# Altium PCB (3V-16V)-3.3V Regulator.PcbDoc
Units mil, origin at the board's own origin, x right, y up, seen from the top; angles counter-clockwise.
Board outline 6000 x 4000 mil, 2 copper layers (Top Layer, Bottom Layer); 7 components, 7 nets, 19 pads, 0 vias.
Unrouted connection lines stored in the file: 7.
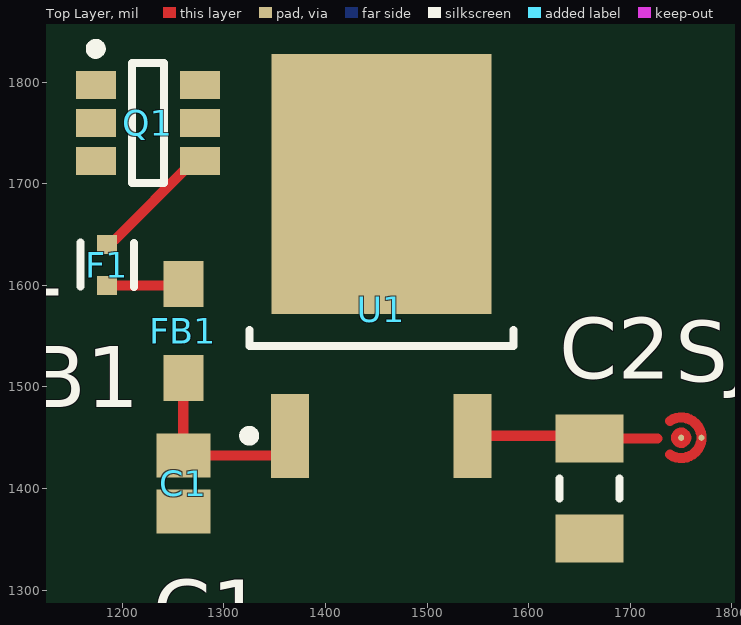
[diagram p0: Top Layer view]
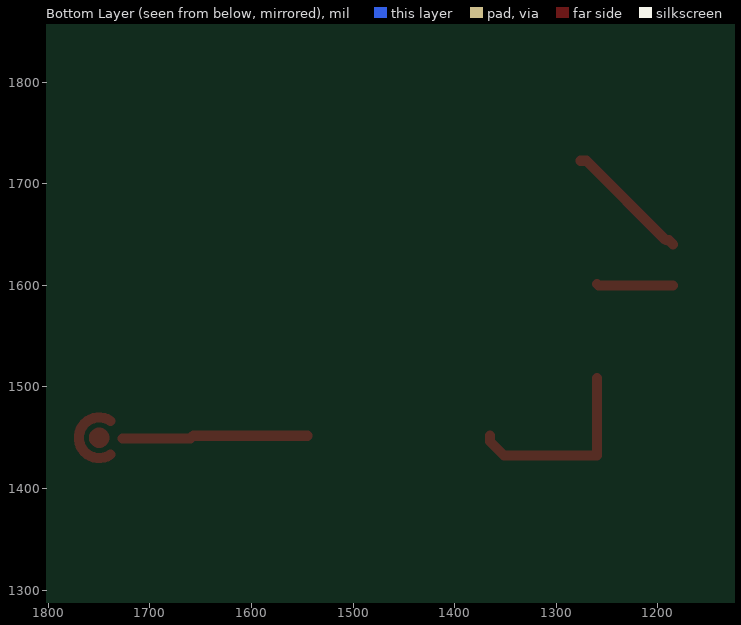
[diagram p1: Bottom Layer view, seen from below]

## Layer stack, top to bottom
Top Solder: solder mask 0.4, Solder Resist, Dk 3.5
Top Layer: signal copper 1.4
Dielectric 1: dielectric 12.6, FR-4, Dk 4.8
Bottom Layer: signal copper 1.4
Bottom Solder: solder mask 0.4, Solder Resist, Dk 3.5

## Board outline
1000,1000 7000,1000 7000,5000 1000,5000

## Design rules (kind name [scope] priority, off if disabled: settings)
Clearance [All] p1: gap=10 ignorepadtopadclearanceinfootprint=FALSE except(0: Arc-Hole Track-Hole SMDPad-Hole THPad-Hole Via-Hole Fill-Hole Poly-Hole Region-Hole Text-Hole)
PolygonConnect [All] p1: connectstyle=Relief reliefconductorwidth=10 reliefentries=4 polygonreliefangle="90 Angle" airgapwidth=10
RoomDefinition "(3V-16V)-3.3V Regulator" [InComponentClass('(3V-16V)-3.3V Regulator')] p1: confinementstyle=ConfineIn formatcopy=TRUE lockcomponents=FALSE outline 988.74,1220 3160,1220 3160,2255 988.74,2255
RoutingVias [All] p1: holewidth=28 width=50 viastyle="Through Hole" minholewidth=28 minwidth=50 maxholewidth=28 maxwidth=50
SolderMaskExpansion [All] p1: expansion=4 istentingtop=FALSE
Width [All] p1: maxlimit=10 minlimit=10 preferedwidth=10
30 further rules are at their usual default settings.

## Components (designator, comment, footprint, x,y, rotation, side; value= is the part's Value field where it differs from the comment)
C1 "100nF" CAPC2013X88X50LL20T25 1260,1405 r90 top
C2 "10uF" CAPC3216X180X50LL20T30 1660,1400 r90 top
F1 "500mA" FP-ERBRD-MFG 1185,1620 r270 top value=310mΩ
FB1 "100 @ 100MHz" SMD-0805 1260,1555 r270 top
Q1 "FDC658AP" FAIR-SOT23-6_V 1225,1760 r0 top
SJ1 "Jumper" "6MIL CIRCULAR" 1750,1450 r180 top
U1 "LF33ABDT-TR" TO-252_N 1455,1619.29 r90 top

## Footprints (in the part's own frame and the unit in brackets; to place one, negate y for a bottom-side part, rotate by r counter-clockwise, add the part's x,y. Pads: shape width x height; smd on the part's side, far side on the other; paste and mask are expansions set on the pad)
"6MIL CIRCULAR" [mil]
  round 6 smd mask+0: 1(0,0) 2(-20,0)
  Top Layer circle w10: c0,0 r5
  Top Layer lines w10: 11.09,16.64 ccw(c0,0) 11.09,-16.64
CAPC2013X88X50LL20T25 [mm] "Chip Capacitor, 2-Leads, Body 2.00x1.25mm, IPC High Density"
  rect 1.1x1.35 smd: 1(-0.7,0) 2(0.7,0)
  body extent -1.1,-0.72 1.1,0.72, height 0.88
CAPC3216X180X50LL20T30 [mm] "Chip Capacitor, 2-Leads, Body 3.4x1.8mm, IPC High Density"
  rect 1.2x1.7 smd: 1(-1.25,0) 2(1.25,0)
  silkscreen extent -0.25,-0.75 0.25,0.75, body extent -1.7,-0.9 1.7,0.9, height 1.8
FAIR-SOT23-6_V [mm] "SOT23, 6-Leads, Body 2.9x1.6mm, Pitch 0.95mm"
  rect 1x0.7 smd: 1(-1.3,0.95) 2(-1.3,0) 3(-1.3,-0.95) 4(1.3,-0.95) 5(1.3,0) 6(1.3,0.95)
  silkscreen extent -1.42,-1.5 0.4,1.97, body extent -1.4,-1.45 1.4,1.45, height 1.45
FP-ERBRD-MFG [mm]
  rect 0.475x0.5 smd paste+0 mask+0: 1(-0.512,0) 2(0.513,0)
  silkscreen extent -0.56,-0.67 0.55,0.67, body extent -0.85,-0.4 0.85,0.4, height 0.25
SMD-0805 [mm] "Chip Inductor, 2-Leads, Body 2.0x1.2mm"
  rect 1.15x1 smd: 1(-1.175,0) 2(1.175,0)
  body extent -1,-0.6 1,0.6, height 0.89
TO-252_N [mm] "D-PAK, 4-Leads, Body 6.1x6.5mm, Pitch 2.28mm, Lead Span 9.7mm, IPC Medium Density"
  rect 2.1x0.95 smd: 1(-4.25,2.28) 3(-4.25,-2.28)
  rect 6.5x5.5 smd: 4(2.05,0)
  silkscreen extent -4.37,-3.3 -1.6,3.43, body extent -2,-3.3 4.2,3.3, height 2.4

## Part data
C1: library part CMP-2007-00278-1, Case Code (Imperial)=0805, Case Code (Metric)=2012, Dielectric=X7R, Dielectric Material=Ceramic, Manufacturer=Kemet, Manufacturer Part Number=C0805C104K5RACAUTO, Max Operating Temperature=125°C, Min Operating Temperature=-55°C, Package Quantity=4000, Ratings=AEC-Q200, Supplier Part Number 1=399-6928-1-ND, Tolerance=10%, Voltage Rating=50V, Capacitance=100nF, Case/Package=0805, Category="Ceramic Capacitors", ComponentLink1Description=https://datasheet.ciiva.com/6093/1732732-6093283.pdf?src-supplier=Farnell, ComponentLink1URL=https://datasheet.ciiva.com/6093/1732732-6093283.pdf?src-supplier=Farnell, ComponentLink2Description=https://datasheet.ciiva.com/7842/1732732-7842183.pdf?src-supplier=Element14, ComponentLink2URL=https://datasheet.ciiva.com/7842/1732732-7842183.pdf?src-supplier=Element14, ComponentLink3Description=https://datasheet.ciiva.com/22703/1732732-22703418.pdf?src-supplier=Element14, ComponentLink3URL=https://datasheet.ciiva.com/22703/1732732-22703418.pdf?src-supplier=Element14, Contact Plating=Tin,Matte, Depth=1.25mm, Height=0.9mm, Length=2mm, Mount="Surface Mount", Packaging="Tape and Reel", Part Number=C0805C104K5RACAUTO, Pricing 1="1=0.20000, 10=0.13900, 100=0.07020, 500=0.04804, 1000=0.04250 (USD)", Radiation Hardening=No, REACH SVHC="No SVHC", RoHS=Yes, Stock 1=74500, Supplier 1=Digi-Key, Termination=SMD/SMT, Thickness=0.035inch, Voltage Rating (DC)=50V, Width=0.049inch
C2: library part CMP-2000-06107-1, "Chip Capacitor, 10 uF, +/- 10%, 25 V, -55 to 85 degC, 1206 (3216 Metric), RoHS, Tape and Reel", Capacitance=10µF, Case Code (Imperial)=1206, Case Code (Metric)=3216, Dielectric=X5R, Manufacturer="Samsung Electro-Mechanics", Manufacturer Part Number=CL31A106KAHNNNE, Max Operating Temperature=85°C, Min Operating Temperature=-55°C, Package Description="2-Pin Surface Mount Device, Body 3.2 x 1.6 mm", Rated Voltage=25V, Supplier Part Number 1=1276-1075-1-ND, Tolerance=10%, Tolerance (%)=±10%, Case Size/Dimension=1206, Case/Package=1206, Category="Ceramic Capacitors", ComponentLink1Description=https://datasheet.ciiva.com/25710/cl31a106kahnnne-25710837.pdf?src-supplier=Digi-Key, ComponentLink1URL=https://datasheet.ciiva.com/25710/cl31a106kahnnne-25710837.pdf?src-supplier=Digi-Key, ComponentLink2Description=https://datasheet.ciiva.com/15195/getdatasheetpartid-355210-15195990.pdf?src-supplier=Verical, ComponentLink2URL=https://datasheet.ciiva.com/15195/getdatasheetpartid-355210-15195990.pdf?src-supplier=Verical, ComponentLink3Description=https://datasheet.ciiva.com/29201/452519-da-01-en-vs-kondensator-1206-29201124.pdf?src-supplier=Conrad, ComponentLink3URL=https://datasheet.ciiva.com/29201/452519-da-01-en-vs-kondensator-1206-29201124.pdf?src-supplier=Conrad, Contact Plating=Tin, Datasheet URL=https://datasheet.ciiva.com/29201/452519-da-01-en-vs-kondensator-1206-29201124.pdf, Datasheet Version=11/2010, Depth=1.6mm, Height=1.6mm, Lead Free="Lead Free", Length=3.2mm, Manufacturer URL=http://www.samsungsem.com/global/index.jsp, Material=Ceramic, Mount="Surface Mount", Mounting Technology=SurfaceMount, Package Reference=1206, Packaging="Tape and Reel", Pricing 1="1=0.24000, 10=0.16500, 100=0.08360, 500=0.05720, 1000=0.05060 (USD)", Pricing 2="10=0.04400, 100=0.03140, 300=0.02920, 1000=0.02690, 5000=0.02540, 10000=0.02510, 10=0.04100, 100=0.02930, 300=0.02710, 1000=0.02500, 5000=0.02360, 10000=0.02340, 10=0.21300, 100=0.15210, 300=0.14120, 1000=0.13020, 5000=0.12290, 10000=0.12170, 10=0.19910, 100=0.14220, 300=0.13200, 1000=0.12170, 5000=0.11490, 10000=0.11380, 10=0.02670, 100=0.01910, 300=0.01770, 1000=0.01630, 5000=0.01540, 10000=0.01530, 10=0.02400, 100=0.01720, 300=0.01590, 1000=0.01470, 5000=0.01390, 10000=0.01370, 10=0.23290, 100=0.16630, 300=0.15440, 1000=0.14240, 5000=0.13440, 10000=0.13310, 10=3.22300, 100=2.30210, 300=2.13630, 1000=1.97060, 5000=1.86010, 10000=1.84170, 10=0.12870, 100=0.09190, 300=0.08530, 1000=0.07870, 5000=0.07430, 10000=0.07350, 10=2.09650, 100=1.49740, 300=1.38960, 1000=1.28180, 5000=1.21000, 10000=1.19800, 10=0.28100, 100=0.20070, 300=0.18620, 1000=0.17180, 5000=0.16220, 10000=0.16050, 10=0.04190, 100=0.02990, 300=0.02780, 1000=0.02560, 5000=0.02420, 10000=0.02390, 10=0.03005, 100=0.02146, 300=0.01992, 1000=0.01837, 5000=0.01734, 10000=0.01717 (AUD)", Radiation Hardening=No, RoHS=Yes, Stock 1=396277, Stock 2=460, Supplier 1=Digi-Key, Supplier 2=LCSC, Supplier Part Number 2=C9807, Thickness=0.071inch, Voltage=25V, Voltage Rating=25V, Voltage Rating (DC)=25V, Width=0.063inch
F1: library part CMP-05590-000002-1, "FUSE BOARD MNT 500MA 32VDC 0402", Case Code (Imperial)=0402, Case Code (Metric)=1005, DC Cold Resistance=310mR, Fuse Current=0.5A, Fuse Interrupt Dc Current=35A, Manufacturer="Panasonic Electronic Components", Manufacturer Part Number=ERB-RD0R50X, Max Fuse Dc Voltage=32V, Max Operating Temperature=125°C, Min Operating Temperature=-40°C, Package=ERBRD, Package Quantity=10000, Resistance=310mΩ, Supplier Part Number 1=P15122CT-ND, Temperature="-40°C to +125°C", Temperature Range High=+125°C, Approvals=UL, Automotive=No, Body Material=Alumina, Case/Package=0402, Category=Fuse, ComponentLink1Description=https://datasheet.ciiva.com/25619/0900766b810c2f76-25619805.pdf?src-supplier=RSComponents, ComponentLink1URL=https://datasheet.ciiva.com/25619/0900766b810c2f76-25619805.pdf?src-supplier=RSComponents, ComponentLink2Description=Datasheet, ComponentLink2URL=https://industrial.panasonic.com/cdbs/www-data/pdf/AFA0000/AFA0000C7.pdf, ComponentLink3Description=https://datasheet.ciiva.com/299/afa0000ce6-299062.pdf?src-supplier=Digi-Key, ComponentLink3URL=https://datasheet.ciiva.com/299/afa0000ce6-299062.pdf?src-supplier=Digi-Key, ComponentLink4Description=https://datasheet.ciiva.com/299/afa0000ce6-299063.pdf?src-supplier=Digi-Key, ComponentLink4URL=https://datasheet.ciiva.com/299/afa0000ce6-299063.pdf?src-supplier=Digi-Key, ComponentLink5Description=https://datasheet.ciiva.com/299/afa0000ce6-299064.pdf?src-supplier=Digi-Key, ComponentLink5URL=https://datasheet.ciiva.com/299/afa0000ce6-299064.pdf?src-supplier=Digi-Key, ComponentLink6Description=https://datasheet.ciiva.com/5813/1328695-5813610.pdf?src-supplier=Farnell, ComponentLink6URL=https://datasheet.ciiva.com/5813/1328695-5813610.pdf?src-supplier=Farnell, ComponentLink7Description=https://datasheet.ciiva.com/24088/panasonic-afa0000ce6-327311-24088239.pdf?src-supplier=Mouser, ComponentLink7URL=https://datasheet.ciiva.com/24088/panasonic-afa0000ce6-327311-24088239.pdf?src-supplier=Mouser, ComponentLink8Description=https://datasheet.ciiva.com/46392/1328695-46392479.pdf?src-supplier=Element14, ComponentLink8URL=https://datasheet.ciiva.com/46392/1328695-46392479.pdf?src-supplier=Element14, Current=500mA, Current Rating=500mA, Device Class L1="Circuit Protection", Device Class L2=Fuses, Device Class L3=unset, Digikey Description="FUSE BOARD MNT 500MA 32VDC 0402", Fuse Blow Speed=Fast, Fuse Type="Board Mount (Cartridge Style Excluded)", Height=0.49mm, Ipc Land Pattern Name=CAPC10050X39, Lead Free=Yes, Length=1mm, Max Voltage Rating (DC)=32V, Mount="Surface Mount", Mouser Description="Fuse Chip Fast Acting 0.5A 32V SMD Solder Pad 0402 1 X 0.5 X 0.39mm T/R UL/cUL", Number of Pins=2, Octopart=https://octopart.com/erb-rd0r50x-panasonic-21220527, Packaging="Tape and Reel", Pricing 1="1=0.27000, 5=0.26200, 10=0.25000, 50=0.22340, 100=0.20790, 250=0.18480, 500=0.15400, 1000=0.14630, 5000=0.11550 (USD)", Pricing 2="20=0.04290, 200=0.03240, 600=0.03050, 2000=0.02860, 10000=0.02770, 20000=0.02730, 20=0.04000, 200=0.03020, 600=0.02840, 2000=0.02660, 10000=0.02580, 20000=0.02540, 20=0.20780, 200=0.15710, 600=0.14770, 2000=0.13840, 10000=0.13430, 20000=0.13220, 20=0.19420, 200=0.14680, 600=0.13810, 2000=0.12940, 10000=0.12550, 20000=0.12360, 20=0.02610, 200=0.01970, 600=0.01850, 2000=0.01740, 10000=0.01680, 20000=0.01660, 20=0.02340, 200=0.01770, 600=0.01670, 2000=0.01560, 10000=0.01510, 20000=0.01490, 20=0.22720, 200=0.17170, 600=0.16150, 2000=0.15130, 10000=0.14680, 20000=0.14460, 20=3.14420, 200=2.37660, 600=2.23560, 2000=2.09460, 10000=2.03200, 20000=2.00100, 20=0.12550, 200=0.09490, 600=0.08930, 2000=0.08360, 10000=0.08110, 20000=0.07990, 20=2.04520, 200=1.54590, 600=1.45420, 2000=1.36250, 10000=1.32170, 20000=1.30160, 20=0.27410, 200=0.20720, 600=0.19490, 2000=0.18260, 10000=0.17710, 20000=0.17440, 20=0.04090, 200=0.03090, 600=0.02910, 2000=0.02720, 10000=0.02640, 20000=0.02600, 20=0.02931, 200=0.02216, 600=0.02084, 2000=0.01953, 10000=0.01894, 20000=0.01865 (AUD)", REACH SVHC="No SVHC", RoHS=TRUE, Stock 1=29695, Stock 2=200, Supplier 1=Digi-Key, Supplier 2=LCSC, Supplier Part Number 2=C424346, Temperature Range Low=-40°C, Voltage Rating=32V, Voltage Rating (DC)=32V, Width=0.5mm
FB1: library part CMP-0220-00039-1, "SMD EMI Suppression Ferrite Bead WE-CBF, Z = 100 Ohm", Case Code (Imperial)=0805, Case Code (Metric)=2012, Case/Package=SMD/SMT, Current Rating=1A, DC Resistance (DCR)=150mR, Manufacturer="Wurth Electronics", Manufacturer Part Number=74279207, Max Operating Temperature=125°C, Min Operating Temperature=-55°C, Package Quantity=4000, Supplier Part Number 1=732-4624-1-ND, Test Frequency=400MHz, Tolerance=25%, Category="Ferrite Beads and Chips", ComponentLink1Description="Manufacturer Link", ComponentLink1URL=http://www.we-online.com, ComponentLink2Description=Datasheet, ComponentLink2URL=http://www.we-online.de/katalog/media/pdf/74279207.pdf, ComponentLink3Description=https://datasheet.ciiva.com/1560/74279207-1560865.pdf?src-supplier=Newark, ComponentLink3URL=https://datasheet.ciiva.com/1560/74279207-1560865.pdf?src-supplier=Newark, ComponentLink4Description=https://datasheet.ciiva.com/11795/0900766b80bbd134-11795989.pdf?src-supplier=RSComponents, ComponentLink4URL=https://datasheet.ciiva.com/11795/0900766b80bbd134-11795989.pdf?src-supplier=RSComponents, ComponentLink5Description=https://datasheet.ciiva.com/1126/74279207-1126627.pdf?src-supplier=Element14, ComponentLink5URL=https://datasheet.ciiva.com/1126/74279207-1126627.pdf?src-supplier=Element14, ComponentLink6Description=https://datasheet.ciiva.com/29364/74279207-29364438.pdf?src-supplier=Digi-Key, ComponentLink6URL=https://datasheet.ciiva.com/29364/74279207-29364438.pdf?src-supplier=Digi-Key, ComponentLink7Description=https://datasheet.ciiva.com/29364/74279207-29364439.pdf?src-supplier=Digi-Key, ComponentLink7URL=https://datasheet.ciiva.com/29364/74279207-29364439.pdf?src-supplier=Digi-Key, ComponentLink8Description=https://datasheet.ciiva.com/29364/74279207-29364440.pdf?src-supplier=Digi-Key, ComponentLink8URL=https://datasheet.ciiva.com/29364/74279207-29364440.pdf?src-supplier=Digi-Key, DatasheetVersion=Dec-2005, Depth=1.24mm, Height=0.9mm, Impedance="100 Ohm", Lead Free="Lead Free", Length=2mm, Max Current Rating=1A, Max DC Current=1A, Mount="Surface Mount", Number of Lines=1, PackageDescription="Chip Inductor, 2-Leads, Body 2.0 x 1.2 mm", PackageReference=SMD-0805, PackageVersion=2005, Packaging="Tape and Reel", Pricing 1="1=0.22000, 50=0.21000, 100=0.19300, 500=0.18500, 1000=0.17600, 2000=0.16800 (USD)", REACH SVHC=Unknown, RoHS=Yes, Stock 1=6205, Supplier 1=Digi-Key, Termination=SMD/SMT, Weight=0.000194oz, Width=0.047inch
Q1: library part CMP-2000-06244-1, "Single P-Channel Logic Level PowerTrench(R) MOSFET, -30 V, -4 A, -55 to 150 degC, 6-Pin SOT23, RoHS, Tape and Reel", Case/Package=SOT-23-6, Continuous Drain Current (ID)=4A, Drain to Source Breakdown Voltage=-30V, Drain to Source Resistance=44mR, Drain to Source Voltage (Vdss)=30V, Drain-Source On Resistance-Max=50mO, Gate to Source Voltage (Vgs)=25V, Input Capacitance=470pF, Manufacturer="Fairchild Semiconductor", Max Operating Temperature=150°C, Max Power Dissipation=1.6W, Min Operating Temperature=-55°C, On-State Resistance=50MR, Package Description="6-Pin Small Outline Transistor, Body 2.9 x 1.6 mm, Pitch 0.95 mm", Package Quantity=3000, Package Reference=SOT23-6, Package Version="Rev. 5, 05/2015", Rated Power Dissipation=0.8W, Supplier Part Number 1=C412512, Threshold Voltage=-1.8V, Category=MOSFETs, Channel Type=P-Channel, ComponentLink1Description=https://datasheet.ciiva.com/27056/2021964-27056274.pdf?src-supplier=Jameco, ComponentLink1URL=https://datasheet.ciiva.com/27056/2021964-27056274.pdf?src-supplier=Jameco, ComponentLink2Description=https://datasheet.ciiva.com/15137/getdatasheetpartid-92299-15137737.pdf?src-supplier=Verical, ComponentLink2URL=https://datasheet.ciiva.com/15137/getdatasheetpartid-92299-15137737.pdf?src-supplier=Verical, ComponentLink3Description=https://datasheet.ciiva.com/4438/fdc658ap-103298-4438971.pdf?src-supplier=Mouser, ComponentLink3URL=https://datasheet.ciiva.com/4438/fdc658ap-103298-4438971.pdf?src-supplier=Mouser, ComponentLink4Description=https://datasheet.ciiva.com/28659/1639784-28659062.pdf?src-supplier=Element14, ComponentLink4URL=https://datasheet.ciiva.com/28659/1639784-28659062.pdf?src-supplier=Element14, ComponentLink5Description=https://datasheet.ciiva.com/932/fdc658ap-932028.pdf?src-supplier=Digi-Key, ComponentLink5URL=https://datasheet.ciiva.com/932/fdc658ap-932028.pdf?src-supplier=Digi-Key, ComponentLink6Description=https://datasheet.ciiva.com/932/fdc658ap-932029.pdf?src-supplier=Digi-Key, ComponentLink6URL=https://datasheet.ciiva.com/932/fdc658ap-932029.pdf?src-supplier=Digi-Key, ComponentLink7Description=https://datasheet.ciiva.com/7967/1639784-7967853.pdf?src-supplier=Element14, ComponentLink7URL=https://datasheet.ciiva.com/7967/1639784-7967853.pdf?src-supplier=Element14, ComponentLink8Description=https://datasheet.ciiva.com/22700/1639784-22700877.pdf?src-supplier=Element14, ComponentLink8URL=https://datasheet.ciiva.com/22700/1639784-22700877.pdf?src-supplier=Element14, ComponentLink9Description=https://datasheet.ciiva.com/932/fdc658ap-932030.pdf?src-supplier=Digi-Key, ComponentLink9URL=https://datasheet.ciiva.com/932/fdc658ap-932030.pdf?src-supplier=Digi-Key, Contact Plating=Tin,Matte, Datasheet URL=https://datasheet.ciiva.com/15137/getdatasheetpartid-92299-15137737.pdf, Datasheet Version="Rev. B1, 11/2011", Drain-to-Source Voltage [Vdss]=30V, Dual Supply Voltage=-30V, Element Configuration=Single, Fall Time=12ns, Height=1mm, Lead Free="Lead Free", Length=3mm, Manufacturer Part Number=FDC658AP, Manufacturer URL=https://www.fairchildsemi.com/, Mount="Surface Mount", Mounting Technology=SurfaceMount, Nominal Vgs=-1.8V, Number of Elements=1, Number of Pins=6, Package URL=https://www.fairchildsemi.com/package-drawings/MA/MA06A.pdf, Packaging="Tape and Reel", Power Dissipation=1.6W, Pricing 1="1=0.28960, 10=0.21890, 30=0.20590, 100=0.19290, 500=0.18720, 1000=0.18430, 1=0.27850, 10=0.21050, 30=0.19800, 100=0.18550, 500=0.18000, 1000=0.17730, 1=1.43630, 10=1.08570, 30=1.02130, 100=0.95690, 500=0.92830, 1000=0.91410, 1=1.32530, 10=1.00170, 30=0.94230, 100=0.88290, 500=0.85650, 1000=0.84340, 1=0.17810, 10=0.13460, 30=0.12670, 100=0.11870, 500=0.11510, 1000=0.11340, 1=0.16490, 10=0.12460, 30=0.11720, 100=0.10980, 500=0.10650, 1000=0.10490, 1=1.63950, 10=1.23920, 30=1.16570, 100=1.09220, 500=1.05960, 1000=1.04340, 1=22.35360, 10=16.89600, 30=15.89400, 100=14.89180, 500=14.44630, 1000=14.22610, 1=0.87570, 10=0.66190, 30=0.62270, 100=0.58340, 500=0.56590, 1000=0.55730, 1=15.91350, 10=12.02820, 30=11.31490, 100=10.60150, 500=10.28430, 1000=10.12760, 1=1.85520, 10=1.40230, 30=1.31910, 100=1.23590, 500=1.19890, 1000=1.18070, 1=0.28820, 10=0.21790, 30=0.20490, 100=0.19200, 500=0.18630, 1000=0.18340, 1=0.21155, 10=0.15990, 30=0.15042, 100=0.14093, 500=0.13672, 1000=0.13463 (AUD)", Pricing 2="1=0.52000, 10=0.42000, 25=0.38440, 100=0.24140, 500=0.22350, 1000=0.15198 (USD)", Qg Gate Charge=8.1nC, Radiation Hardening=No, Rds On Max=50mR, REACH SVHC="No SVHC", Rise Time=12ns, RoHS=Yes, Stock 1=69, Stock 2=24038, Supplier 1=LCSC, Supplier 2=Digi-Key, Supplier Part Number 2=FDC658APCT-ND, Termination=SMD/SMT, Turn-Off Delay Time=16ns, Turn-On Delay Time=7ns, Weight=0.036g, Width=1.7mm
SJ1: "Solder Jumper to connect or disconnect a trace."
U1: library part CMP-0244-00064-1, "500mA, Very Low Drop (0.45V) Voltage Regulator, 3.3V, 3-Pin DPAK, Tape and Reel", Case/Package=TO-252, Dropout Voltage=400mV, Input Bias Current=500uA, Manufacturer=STMicroelectronics, Max Input Voltage=16V, Max Operating Temperature=125°C, Max Output Current=500mA, Max Output Voltage=3.3V, Min Input Voltage=3V, Min Operating Temperature=-40°C, Min Supply Voltage=4.3V, Output Voltage Accuracy=1%, Package Quantity=1, Quiescent Current=1mA, Supplier Part Number 1=497-5225-1-ND, Accuracy=1%, Category="Voltage Regulators - Linear", ComponentLink1Description="Manufacturer URL", ComponentLink1URL=http://www.st.com, ComponentLink2Description=Datasheet, ComponentLink2URL=http://www.st.com/internet/com/TECHNICAL_RESOURCES/TECHNICAL_LITERATURE/DATASHEET/CD00000546.pdf, ComponentLink3Description=https://datasheet.ciiva.com/1511/1806095-1511654.pdf?src-supplier=Element14, ComponentLink3URL=https://datasheet.ciiva.com/1511/1806095-1511654.pdf?src-supplier=Element14, ComponentLink4Description=https://datasheet.ciiva.com/2043/cd00000546-2043943.pdf?src-supplier=Digi-Key, ComponentLink4URL=https://datasheet.ciiva.com/2043/cd00000546-2043943.pdf?src-supplier=Digi-Key, ComponentLink5Description=https://datasheet.ciiva.com/2043/cd00000546-2043944.pdf?src-supplier=Digi-Key, ComponentLink5URL=https://datasheet.ciiva.com/2043/cd00000546-2043944.pdf?src-supplier=Digi-Key, ComponentLink6Description=https://datasheet.ciiva.com/2043/cd00000546-2043945.pdf?src-supplier=Digi-Key, ComponentLink6URL=https://datasheet.ciiva.com/2043/cd00000546-2043945.pdf?src-supplier=Digi-Key, ComponentLink7Description=https://datasheet.ciiva.com/16392/cd00000546-16392073.pdf?src-supplier=Future+Electronics, ComponentLink7URL=https://datasheet.ciiva.com/16392/cd00000546-16392073.pdf?src-supplier=Future+Electronics, ComponentLink8Description=https://datasheet.ciiva.com/22694/1806095-22694861.pdf?src-supplier=Element14, ComponentLink8URL=https://datasheet.ciiva.com/22694/1806095-22694861.pdf?src-supplier=Element14, ComponentLink9Description=https://datasheet.ciiva.com/8228/cd00000546-8228718.pdf?src-supplier=Avnet, ComponentLink9URL=https://datasheet.ciiva.com/8228/cd00000546-8228718.pdf?src-supplier=Avnet, Contact Plating=Tin,Matte, DatasheetVersion=1/11/2010, Height=2.4mm, Lead Free="Lead Free", Length=6.6mm, Manufacturer Part Number=LF33ABDT-TR, Max Supply Voltage=16V, Min Output Voltage=3.3V, Mount="Surface Mount", Nominal Output Voltage=3.3V, Number of Outputs=1, Number of Pins=3, Number of Regulators=1, Output Current=500mA, Output Type=Fixed, Output Voltage=3.3V, PackageDescription="3-Pin Transistor Outline Package 2.28 mm Pitch, 9.7 mm Lead Span (DPAK)", PackageReference=TO-252, PackageVersion=2011, Packaging="Tape and Reel", Polarity=Positive, Pricing 1="1=0.84000, 10=0.74100, 25=0.69560, 100=0.52730, 250=0.44880, 500=0.42636, 1000=0.32538 (USD)", Pricing 2="1=0.93400, 10=0.69650, 30=0.65220, 100=0.61030, 500=0.58930, 1000=0.58000, 1=0.86950, 10=0.64830, 30=0.60710, 100=0.56810, 500=0.54860, 1000=0.53990, 1=4.52250, 10=3.37210, 30=3.15780, 100=2.95480, 500=2.85330, 1000=2.80820, 1=4.22740, 10=3.15210, 30=2.95180, 100=2.76200, 500=2.66710, 1000=2.62500, 1=0.56710, 10=0.42280, 30=0.39600, 100=0.37050, 500=0.35780, 1000=0.35210, 1=0.51000, 10=0.38020, 30=0.35610, 100=0.33320, 500=0.32170, 1000=0.31670, 1=4.94440, 10=3.68670, 30=3.45250, 100=3.23050, 500=3.11960, 1000=3.07020, 1=68.43220, 10=51.02550, 30=47.78310, 100=44.71120, 500=43.17540, 1000=42.49270, 1=2.73230, 10=2.03730, 30=1.90790, 100=1.78520, 500=1.72390, 1000=1.69660, 1=44.51330, 10=33.19070, 30=31.08160, 100=29.08340, 500=28.08440, 1000=27.64040, 1=5.96540, 10=4.44800, 30=4.16540, 100=3.89760, 500=3.76370, 1000=3.70420, 1=0.88960, 10=0.66330, 30=0.62120, 100=0.58130, 500=0.56130, 1000=0.55240, 1=0.63796, 10=0.47568, 30=0.44546, 100=0.41682, 500=0.40250, 1000=0.39614 (AUD)", Radiation Hardening=No, REACH SVHC="No SVHC", RoHS=Yes, Stock 1=15972, Stock 2=2475, Supplier 1=Digi-Key, Supplier 2=LCSC, Supplier Part Number 2=C155553, Termination=SMD/SMT, Voltage=3.3V, Width=6.2mm

## Nets (pads, with @x,y where several pads share a name; then routed paths per layer and width w, separated by ;. In a path a pad name is that pad's centre, name@x,y a point inside that pad or via, vN(x,y) a via of type N, cw(c..) or ccw(c..) an arc to the next point about the centre after c; other vN are vias at no path point)
+3V3: SJ1.2
GND: C1.1 C2.1 Q1.3 U1.4
NetC1_2: C1.2 FB1.2 U1.1 | length 192.8
  Top Layer w10: FB1.2 C1.2 1351.54,1432.56 1365.24,1446.26 U1.1
NetC2_2: C2.2 SJ1.1 U1.3 | length 183.1
  Top Layer w10: U1.3 1657.24,1451.97 C2.2 1726.71,1449.21
NetF1_1: F1.1 Q1.4 | length 125.3
  Top Layer w10: F1.1 1189.35,1644.53 1192.2,1644.53 1270.28,1722.6 Q1.4
NetF1_2: F1.2 FB1.1 | length 75.6
  Top Layer w10: F1.2 1258.56,1599.82 FB1.1
NetQ1_1: Q1.1 Q1.2 Q1.5 Q1.6